# Altium PCB PCB1.PcbDoc (part 1 of 2)
Units mm, origin at the board's own origin, x right, y up, seen from the top; angles counter-clockwise.
Board outline 63.44 x 74 mm, 2 copper layers (Top Layer, Bottom Layer), stack 1.571 mm thick; 46 components, 28 nets, 149 pads, 26 vias.
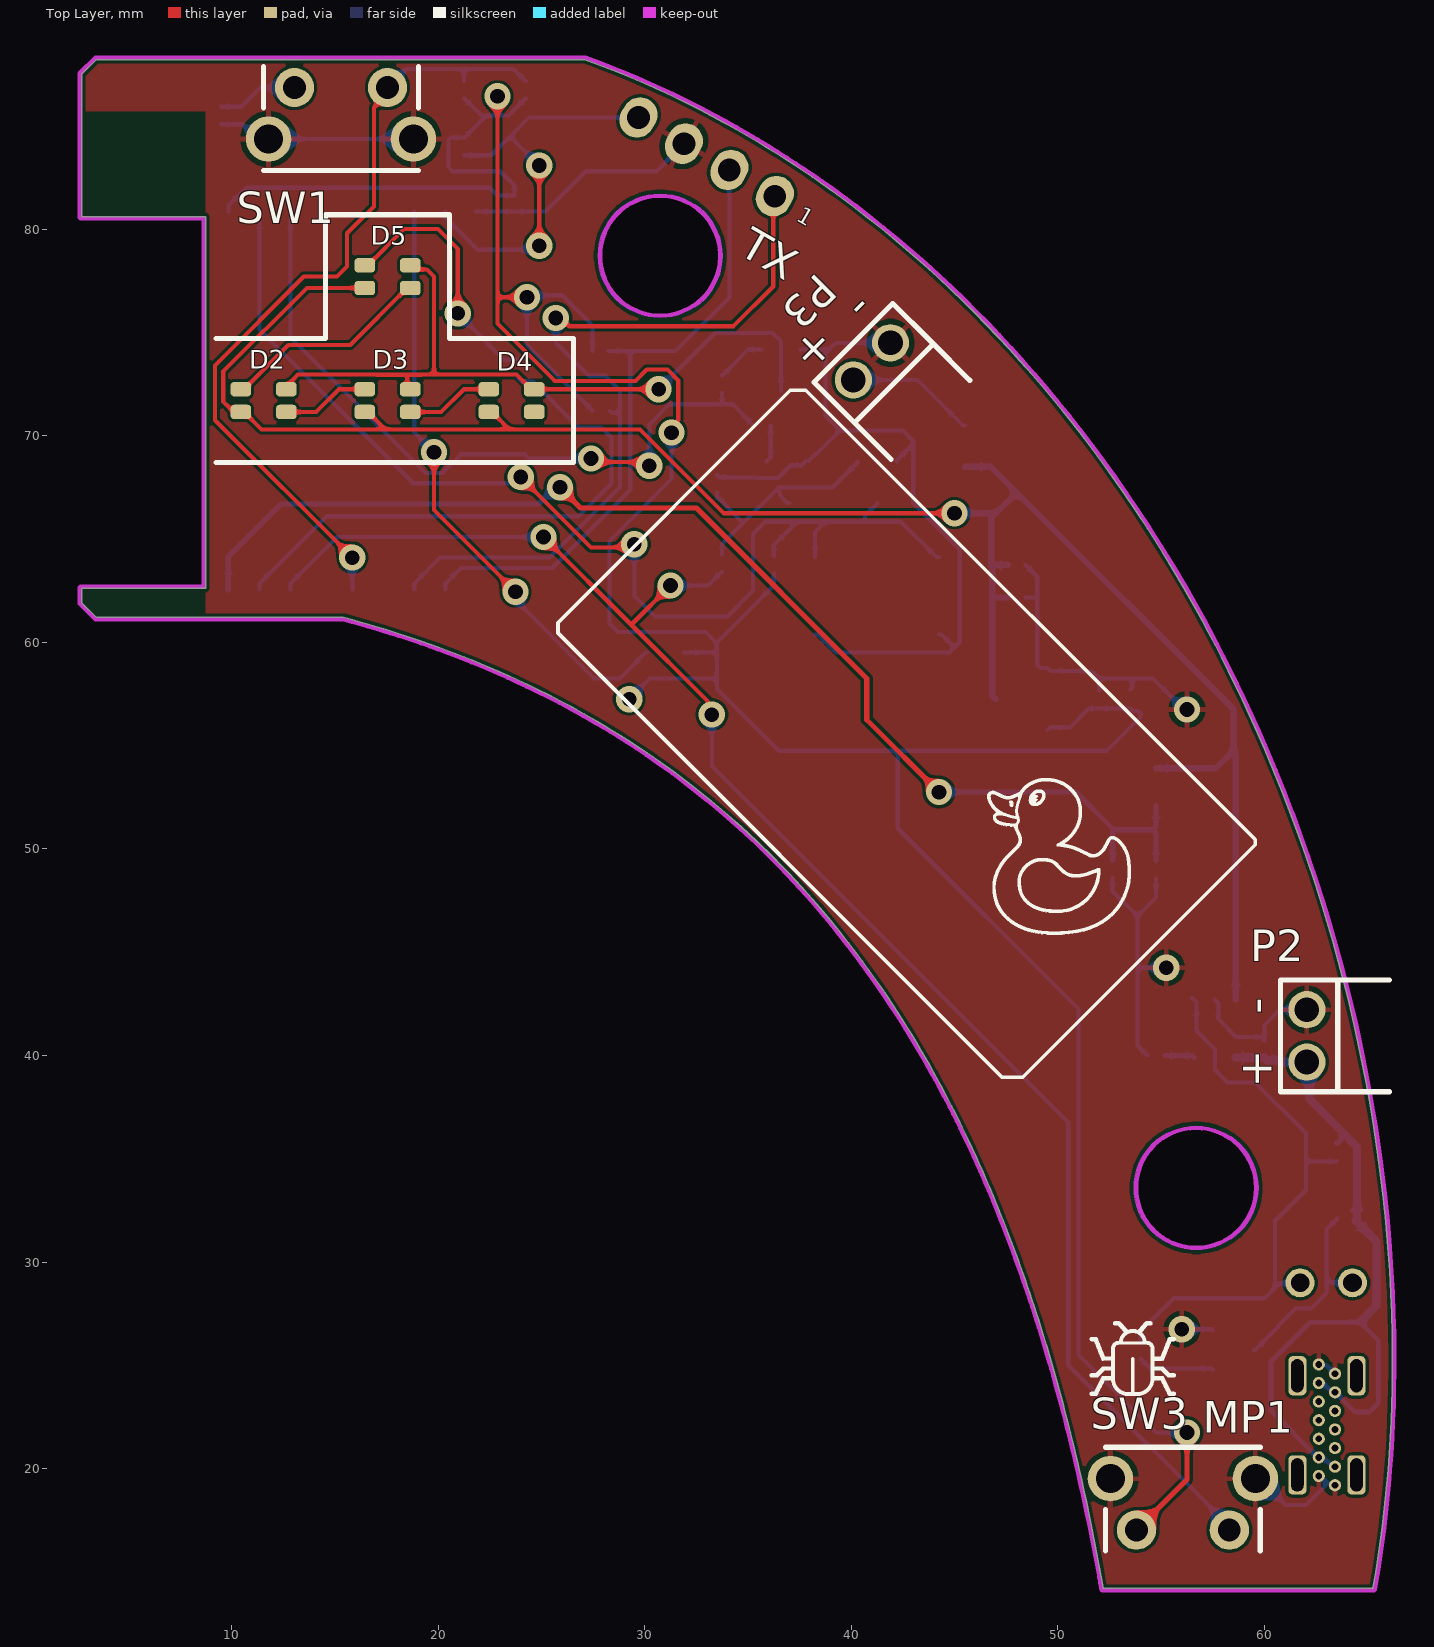
[diagram p0: Top Layer view]
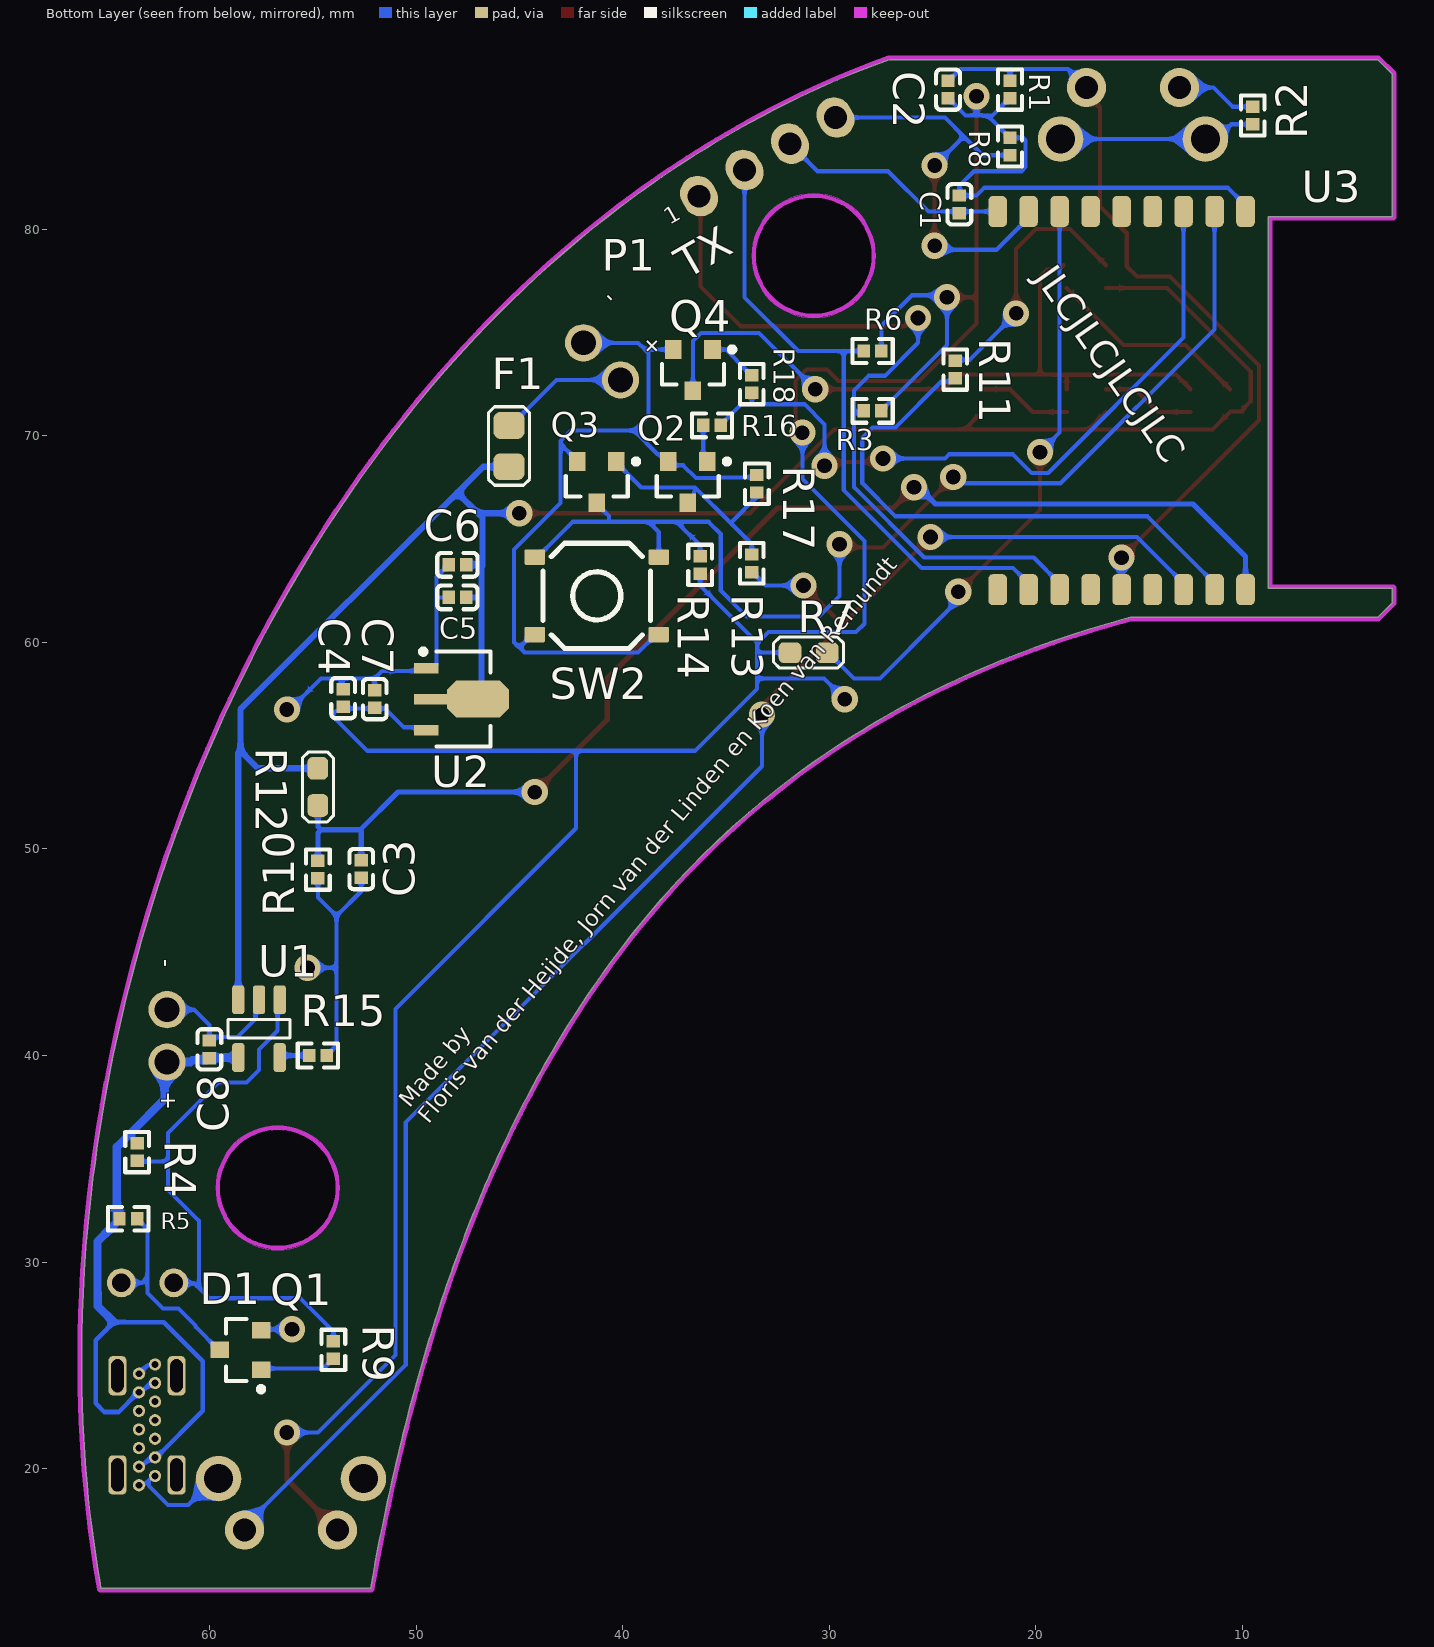
[diagram p1: Bottom Layer view, seen from below]
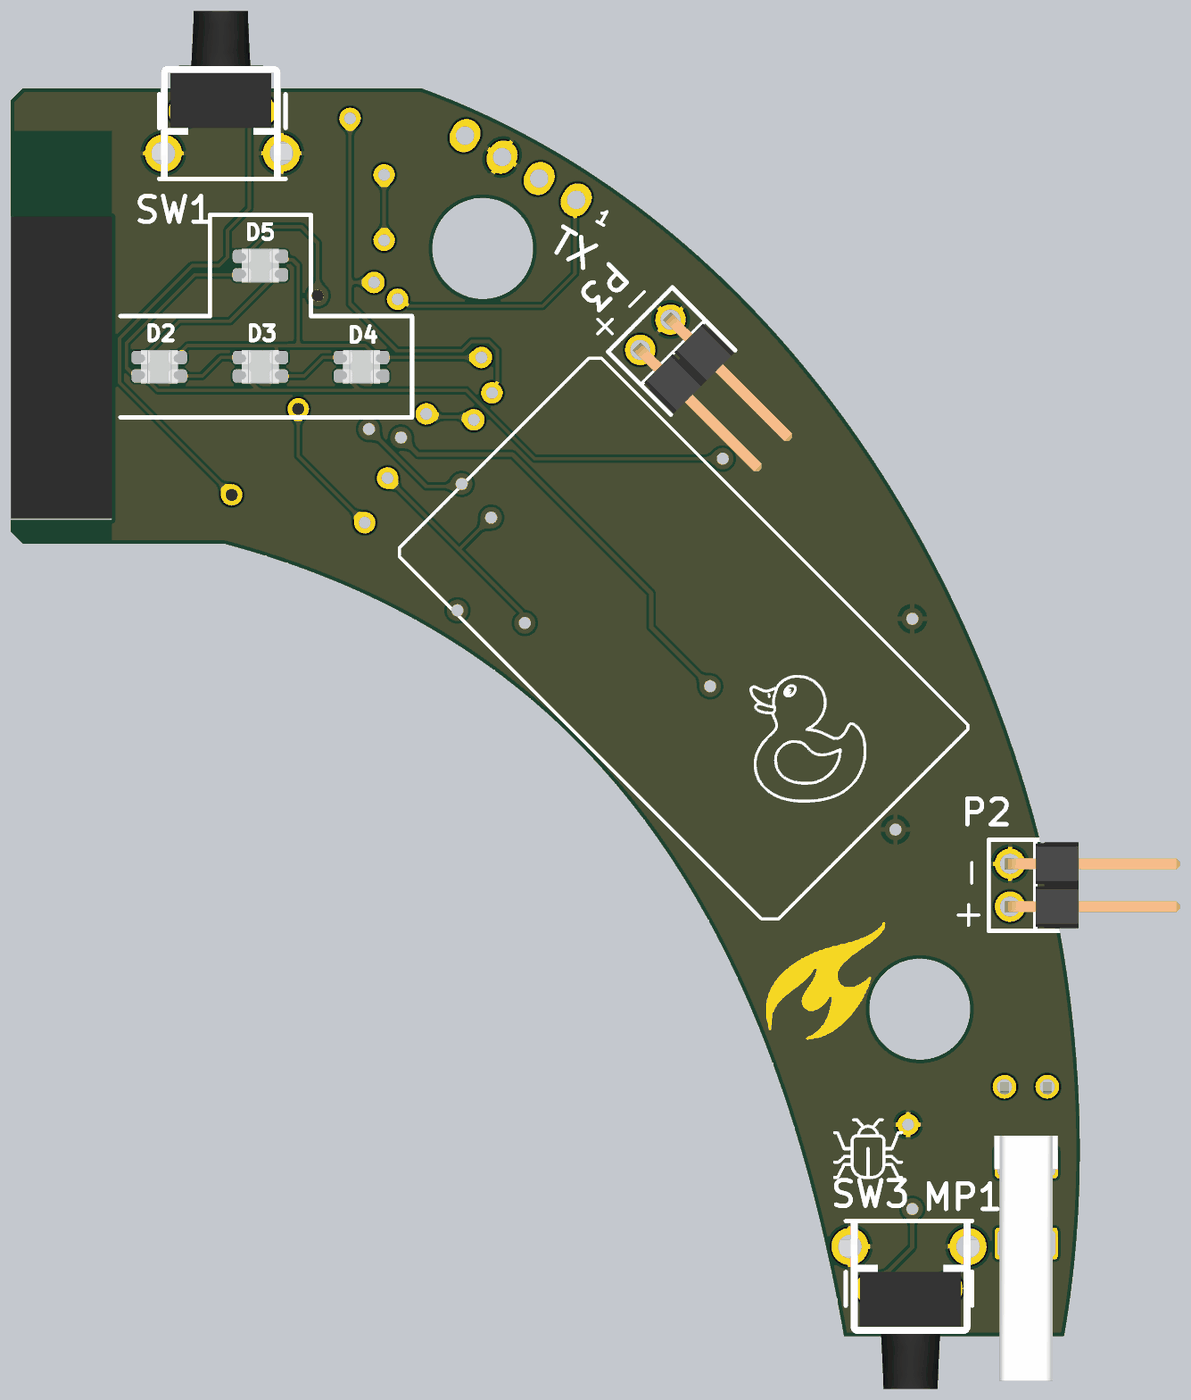
[diagram p3: 3D render of the assembled board from above, using the file's embedded part models]
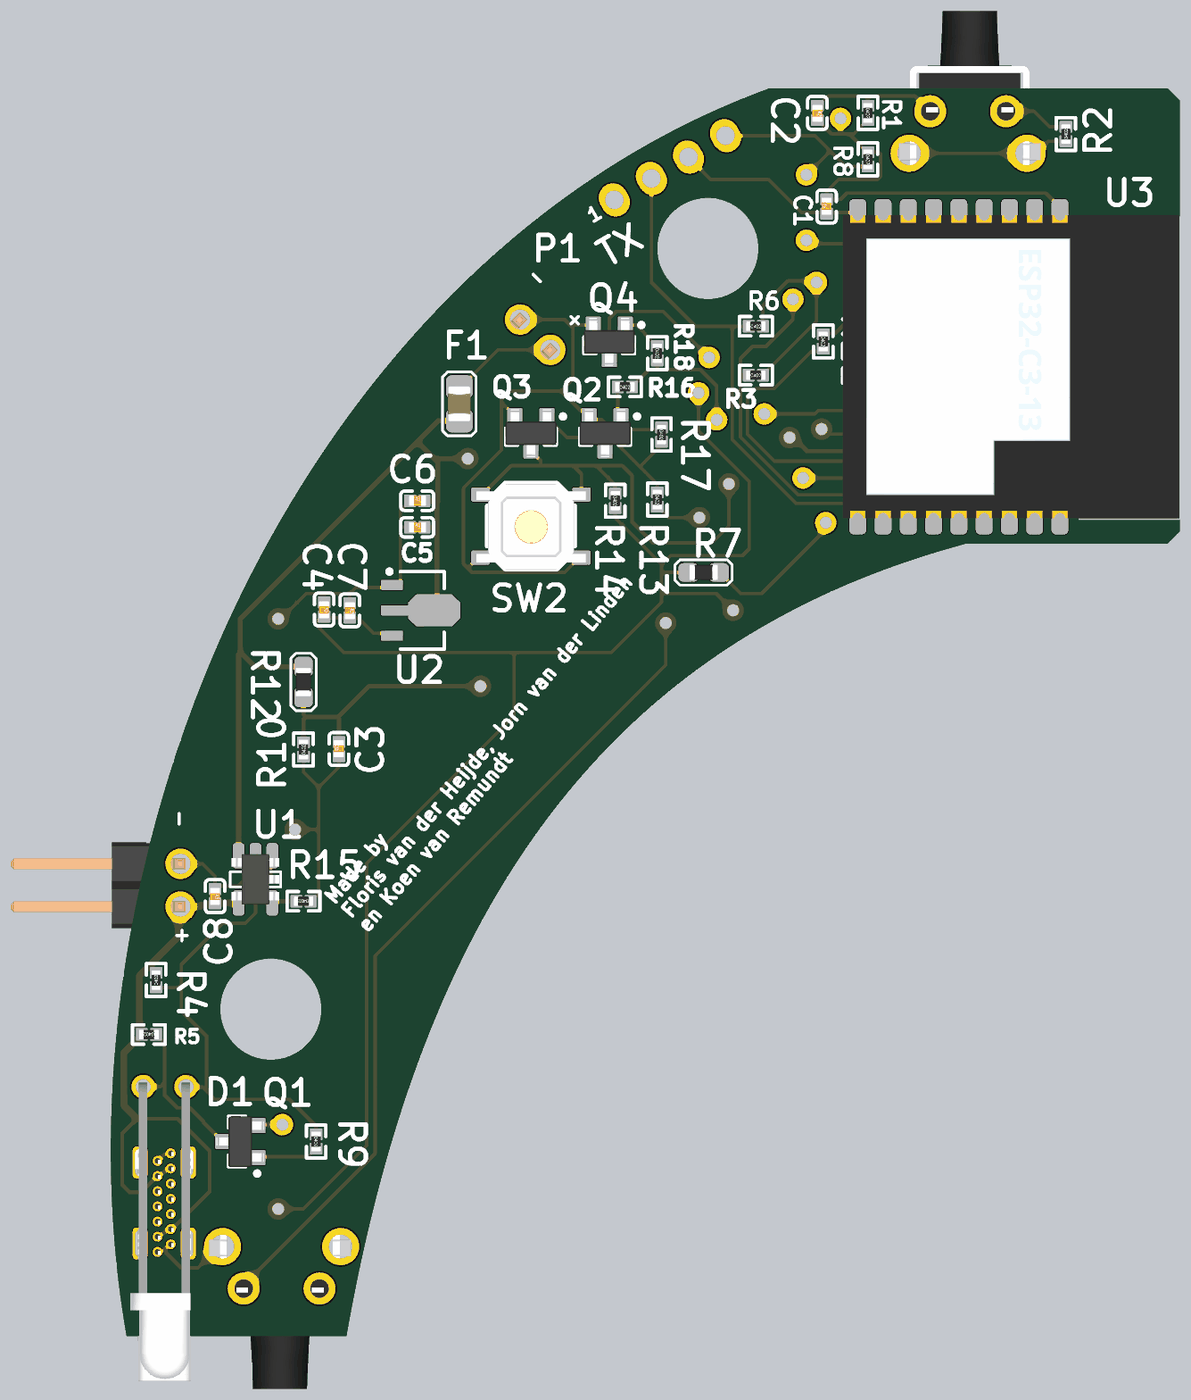
[diagram p4: 3D render of the assembled board from below, using the file's embedded part models]

## Layer stack, top to bottom
Top Solder: solder mask 0.0102, Solder Resist, Dk 3.5
Top Layer: signal copper 0.0356
Dielectric 1: dielectric 1.5, FR-4, Dk 4.8
Bottom Layer: signal copper 0.0356
Bottom Solder: solder mask 0.0102, Solder Resist, Dk 3.5

## Board outline
39.503,45.918 39.097,46.421 38.647,46.962 38.151,47.538 ccw(c5.449,18.878) 37.607,48.147 ccw(c5.795,19.193) 36.973,48.828 ccw(c6.123,19.505) 36.203,49.618 ccw(c6.657,20.055) 31.413,53.73 ccw(c6.466,19.792) 30.127,54.639 ccw(c6.218,19.43) 29.198,55.253 ccw(c5.997,19.085) 28.4,55.752 ccw(c5.759,18.698) 27.689,56.177 27.072,56.532 26.499,56.849 25.918,57.16 25.385,57.435 24.846,57.705 24.355,57.943 23.86,58.176 23.416,58.379 22.969,58.578 22.517,58.773 22.062,58.964 21.661,59.129 21.256,59.29 20.849,59.448 20.439,59.604 20.026,59.756 19.61,59.906 19.191,60.053 18.83,60.176 18.467,60.297 18.101,60.416 17.733,60.533 17.363,60.648 16.991,60.761 16.616,60.871 16.24,60.979 15.861,61.085 15.416,61.206 3.467,61.206 2.744,61.918 2.744,62.606 8.744,62.606 8.744,80.606 2.744,80.606 2.744,87.495 3.467,88.206 27.109,88.206 cw(c10.788,43.371) 29.61,87.215 cw(c10.587,42.9) 31.318,86.443 cw(c10.368,42.437) 32.674,85.771 cw(c10.129,41.973) 33.85,85.145 cw(c9.888,41.532) 34.932,84.533 cw(c9.615,41.063) 35.921,83.942 cw(c9.351,40.632) 36.822,83.376 cw(c9.062,40.181) 37.71,82.792 cw(c8.753,39.719) 38.514,82.241 cw(c8.432,39.259) 39.307,81.674 cw(c8.1,38.802) 40.09,81.093 40.793,80.553 41.487,80 42.172,79.436 42.849,78.861 43.517,78.274 44.176,77.677 44.826,77.069 45.403,76.512 45.974,75.947 46.537,75.374 47.092,74.793 47.641,74.204 48.182,73.607 48.774,72.934 49.357,72.253 49.931,71.562 50.496,70.863 51.052,70.154 51.598,69.437 52.135,68.712 52.663,67.979 53.232,67.164 53.79,66.339 54.336,65.505 54.919,64.585 55.488,63.655 56.089,62.637 56.673,61.608 cw(c-6.323,26.533) 57.284,60.487 cw(c-6.985,26.18) 57.917,59.274 cw(c-7.679,25.827) 58.568,57.966 cw(c-8.366,25.494) 59.269,56.478 cw(c-9.067,25.173) 60.011,54.805 cw(c-9.764,24.875) 60.881,52.689 cw(c-10.517,24.579) 62.023,49.597 cw(c-11.01,24.405) 64.917,38.668 cw(c-9.702,24.667) 65.288,36.524 cw(c-8.928,24.79) 65.537,34.825 cw(c-8.172,24.892) 65.726,33.304 cw(c-7.398,24.98) 65.866,31.963 65.974,30.712 66.055,29.552 66.113,28.483 66.152,27.505 66.177,26.528 66.188,25.643 66.188,24.759 66.176,23.877 66.156,23.085 66.126,22.295 66.087,21.508 66.038,20.723 65.98,19.94 65.921,19.247 65.854,18.556 65.78,17.867 65.698,17.18 65.609,16.496 65.512,15.814 65.407,15.135 65.295,14.459 65.251,14.206 52.199,14.206 52.172,14.36 52.103,14.743 52.034,15.124 51.963,15.504 51.892,15.882 51.819,16.259 51.746,16.634 51.671,17.008 51.596,17.38 51.519,17.751 51.442,18.12 51.363,18.488 51.283,18.855 51.203,19.22 51.121,19.583 51.039,19.945 50.955,20.305 50.871,20.664 50.785,21.022 50.698,21.378 50.611,21.732 50.522,22.085 50.432,22.437 50.341,22.787 50.25,23.135 50.157,23.482 50.063,23.828 49.968,24.172 49.872,24.515 49.775,24.856 49.677,25.195 49.577,25.534 49.477,25.87 49.376,26.205 49.273,26.539 49.17,26.871 49.065,27.202 48.96,27.531 48.853,27.859 48.745,28.185 48.636,28.51 48.526,28.833 48.415,29.155 48.303,29.475 48.19,29.794 48.076,30.111 47.96,30.427 47.844,30.741 47.726,31.054 47.607,31.365 47.487,31.675 47.366,31.984 47.244,32.29 47.121,32.596 46.997,32.9 46.871,33.202 46.744,33.503 46.617,33.802 46.488,34.1 46.332,34.456 46.174,34.809 46.014,35.161 45.853,35.51 45.69,35.857 45.526,36.202 45.36,36.544 45.192,36.885 45.023,37.223 44.852,37.559 44.679,37.893 44.504,38.225 44.328,38.555 44.15,38.883 43.97,39.208 43.789,39.532 43.575,39.906 43.359,40.278 43.141,40.646 42.92,41.012 42.697,41.375 42.471,41.735 42.243,42.092 41.98,42.496 41.713,42.897 41.444,43.294 41.171,43.686 40.86,44.124 40.545,44.557 40.226,44.984 39.867,45.454
cut-out: 30.751,75.711 cw(c30.751,78.711) 27.751,78.711 cw(c30.751,78.711) 30.751,81.711 cw(c30.751,78.711) 33.751,78.711 cw(c30.751,78.711)
cut-out: 56.691,30.597 cw(c56.691,33.597) 53.691,33.597 cw(c56.691,33.597) 56.691,36.597 cw(c56.691,33.597) 59.691,33.597 cw(c56.691,33.597)

## Design rules (kind name [scope] priority, off if disabled: settings)
BoardOutlineClearance [All] p1: gap=0.2 ignorepadtopadclearanceinfootprint=FALSE except(0: Arc-SplitContinuation Track-SplitContinuation SMDPad-SplitContinuation THPad-SplitContinuation Via-SplitContinuation Fill-SplitContinuation Poly-SplitContinuation Region-SplitContinuation Text-SplitContinuation)
Clearance [All] p1: gap=0.15 ignorepadtopadclearanceinfootprint=FALSE except(0: Arc-Hole Track-Hole SMDPad-Hole THPad-Hole Via-Hole Fill-Hole Poly-Hole Region-Hole Text-Hole; 0.5: SMDPad-Gold Plating)
HoleSize [All] p1: absolutevalues=TRUE maxlimit=2.54 minlimit=0.02 maxpercent=80.000 minpercent=20.000
HoleToHoleClearance [All] p1: gap=0.5 allowstackedmicrovias=TRUE
MinimumAnnularRing [All] p1: minimumring=0.13
MinimumSolderMaskSliver [All] p1: minsoldermaskwidth=0.14
PasteMaskExpansion [All] p1: expansion=0.05
PolygonConnect [All] p1: connectstyle=Relief reliefconductorwidth=0.254 reliefentries=4 polygonreliefangle="90 Angle" airgapwidth=0.254
RoutingVias [All] p1: holewidth=0.711 width=1.27 viastyle="Through Hole" minholewidth=0.711 minwidth=1.27 maxholewidth=0.711 maxwidth=1.27
SilkToSilkClearance [All] p1: silktosilkclearance=0
SilkToSolderMaskClearance [IsPad] p1: minsilkscreentomaskgap=0.15 clearancetoexposedcopper=TRUE
SolderMaskExpansion [All] p1: expansion=0.102 istentingtop=FALSE
Width [All] p1: maxlimit=0.4 minlimit=0.1 preferedwidth=0.2 minimp=50.000000 maximp=50.000000 favimp=50.000000
24 further rules are at their usual default settings.

## Components (designator, comment, footprint, x,y, rotation, side; value= is the part's Value field where it differs from the comment)
C1 "100nF" 0402_C 23.7,81.2 r90 bottom
C2 "1.0uF" 0402_C 24.25,86.75 r270 bottom
C3 "100nF" 0402_C 52.65,49.025 r90 bottom
C4 "100nF" 0402_C 53.525,57.3 r270 bottom
C5 "100nF" 0402_C 48,62.175 r180 bottom
C6 "10uF" 0402_C 48,63.75 r180 bottom
C7 "10uF" 0402_C 52,57.25 r270 bottom
C8 "1.0uF" 0402_C 60,40.3 r270 bottom
D1 "=value" "3MM ROUND LAMP" 62.992,29 r180 bottom
D2 "Neopixel WS2812B-2020" WS2812B-2020 11.556,71.7 r0 top locked
D3 "Neopixel WS2812B-2020" WS2812B-2020 17.556,71.7 r0 top locked
D4 "Neopixel WS2812B-2020" WS2812B-2020 23.556,71.7 r0 top locked
D5 "Neopixel WS2812B-2020" WS2812B-2020 17.556,77.7 r0 top locked
F1 "1A" "CAP 0805" 45.5,69.5 r90 bottom
MP1 "=value" "USBC 2169890001_SD" 63.02,22.1 r0 top locked
P1 "DNP" "WURTH 61900411121" 33,83.5 r150 bottom value=2.54mm
P2 "2.54mm" "Wurth 61300211021" 62.05,40.95 r270 top
P3 "2.54mm" "Wurth 61300211021" 40.998,73.598 r225 top locked
Q1 "MMBT3904LT1G" SOT-23-3-318-08_V 58.5,25.75 r180 bottom
Q2 "MMBT3904LT1G" SOT-23-3-318-08_V 36.85,67.75 r90 bottom
Q3 "MMBT3904LT1G" SOT-23-3-318-08_V 41.25,67.75 r90 bottom
Q4 "MMBT3904LT1G" SOT-23-3-318-08_V 36.6,73.175 r90 bottom
R1 "10KΩ ±1%" 0402_R 21.25,86.75 r270 bottom
R2 "10Ω ±1%" 0402_R 9.5,85.5 r90 bottom
R3 "10KΩ ±1%" 0402_R 27.9,71.2 r180 bottom
R4 "680Ω ±1%" 0402_R 63.5,35.325 r90 bottom
R5 "680Ω ±1%" 0402_R 63.925,32.1 r0 bottom
R6 "10KΩ ±1%" 0402_R 27.9,74.1 r180 bottom
R7 "10k" "RES 0603" 31,59.5 r180 bottom
R8 "10KΩ ±1%" 0402_R 21.25,84 r270 bottom
R9 "1KΩ ±1%" 0402_R 54,25.75 r270 bottom
R10 "1MΩ ±1%" 0402_R 54.75,49 r90 bottom
R11 "330Ω ±1%" 0402_R 23.9,73.2 r270 bottom
R12 "1.5M" "RES 0603" 54.75,53 r270 bottom
R13 "1KΩ ±1%" 0402_R 33.75,63.825 r270 bottom
R14 "10KΩ ±1%" 0402_R 36.25,63.75 r270 bottom
R15 "3.9KΩ ±1%" 0402_R 54.75,40 r0 bottom
R16 "10KΩ ±1%" 0402_R 35.675,70.5 r180 bottom
R17 "10KΩ ±1%" 0402_R 33.5,67.675 r270 bottom
R18 "10KΩ ±1%" 0402_R 33.75,72.5 r270 bottom
SW1 "TS-1093C-A13B3-D1" TS-1093C-A13B3-D1 15.3,84.36 r180 top locked
SW2 "TS-1187A-B-A-B" TS-1187A-B-A-B 41.25,62.25 r180 bottom
SW3 "TS-1093C-A13B3-D1" TS-1093C-A13B3-D1 56.05,19.52 r0 top
U1 "TP4054" "SOT 23-5" 57.6,41.3 r90 bottom
U2 "HT7333-SOT89" SOT89_L 47.7,57.25 r90 bottom
U3 "ESP32-C3N" ESP32-C3N 12.75,71.7 r270 bottom locked

## Footprints (in the part's own frame and the unit in brackets; to place one, negate y for a bottom-side part, rotate by r counter-clockwise, add the part's x,y. Pads: shape width x height; smd on the part's side, far side on the other; paste and mask are expansions set on the pad)
"3MM ROUND LAMP" [mm]
  round 1.4 hole 0.9: 1(1.27,0) 2(-1.27,0)
  body extent -2.05,-17.35 1.52,0.25, height 6.02
0402_C [mm]
  rect 0.6x0.65 smd mask+0.051: 1(-0.425,0) 2(0.425,0)
  silkscreen extent -0.97,-0.58 0.97,0.58, body extent -0.48,-0.3 0.52,0.3, height 0.2
0402_R [mm]
  rect 0.6x0.65 smd mask+0.051: 1(-0.425,0) 2(0.425,0)
  silkscreen extent -0.97,-0.58 0.97,0.58, body extent -0.57,-0.27 0.58,0.28, height 0.41
"CAP 0805" [mm] "[Last Edit: 19-05-19]"
  rrect50% 1.3x1.5 smd: 1(-1,0) 2(1,0)
  silkscreen extent -1.9,-1 1.9,1, body extent -1.05,-0.67 1.05,0.68, height 0.7
ESP32-C3N [mm]
  rrect50% 1.5x0.9 smd: 1(-9.15,2.9) 2(-9.15,1.4) 3(-9.15,-0.1) 4(-9.15,-1.6) 5(-9.15,-3.1) 6(-9.15,-4.6) 7(-9.15,-6.1) 8(-9.15,-7.6) 9(-9.15,-9.1) 10(9.15,-9.1) 11(9.15,-7.6) 12(9.15,-6.1) 13(9.15,-4.6) 14(9.15,-3.1) 15(9.15,-1.6) 16(9.15,-0.1) 17(9.15,1.4) 18(9.15,2.9)
  Multi-Layer pour cut-out: -14,10 -14,4 14,4 14,10
  body extent -9,-10 9,10, height 3.2
"RES 0603" [mm] "[Last Edit: 19-05-19]"
  rrect50% 1.1x1 smd: 1(0.9,0) 2(-0.9,0)
  silkscreen extent -1.7,-0.75 1.7,0.75, body extent -0.85,-0.45 0.85,0.45, height 0.55
SOT89_L [mm] "SOT89, 3-Leads, Body 4.5x2.4 mm, Pitch 1.5mm, Lead Span 4.1mm, IPC High Density"
  rect 0.5x1.2 smd: 1(1.5,1.8) 3(-1.5,1.8)
  oct 1.8x3 smd: 2(0,-0.7)
  rect 0.5x1.6 smd: 2(0,1.6)
  silkscreen extent -2.3,-1.3 2.42,2.08, body extent -2.3,-1.29 2.3,1.3, height 1.6
"SOT 23-5" [mm] "[Last Edit: 19-05-19]"
  rrect50% 1.4x0.6 smd: 1(1.4,-1.004) 2(1.4,0) 3(1.4,1.004) 4(-1.4,1) 5(-1.4,-1)
  silkscreen extent -0.45,-1.5 0.45,1.5, body extent -1.5,-1.42 1.5,1.42, height 1.2
SOT-23-3-318-08_V [mm] "SOT23, 3-Leads, Body 3.04x1.4mm, Pitch 0.95mm"
  rect 0.9x0.8 smd: 1(1,-0.95) 2(1,0.95) 3(-1,0)
  silkscreen extent -0.7,-2.02 1.12,1.5, body extent -1.42,-1.52 1.42,1.52, height 1.11
TS-1093C-A13B3-D1 [mm]
  round 1.9 hole 1.1: 0(-2.25,-2.49) 1(2.25,-2.49)
  round 2.2 hole 1.4: 2(-3.505,0) 3(3.505,0)
  silkscreen extent -3.75,-3.5 3.75,1.52, body extent -4.11,-8.43 4.3,1.43, height 7.02
TS-1187A-B-A-B [mm]
  rrect20% 1x0.75 smd: A(-3,1.875) B(3,1.875) C(-3,-1.875) D(3,-1.875)
  silkscreen extent -2.6,-2.55 2.6,2.55, body extent -3.24,-2.6 3.26,2.5, height 1.4
"USBC 2169890001_SD" [mm]
  round 0.59 hole 0.33 paste+0 mask+0.05: A1(-0.39,-2.45) A4(-0.39,-1.55) A5(-0.39,-0.65) A6(-0.39,0.25) A7(-0.39,1.15) A9(-0.39,2.05) A12(-0.39,2.95) B1(0.39,2.5) B4(0.39,1.6) B5(0.39,0.7) B6(0.39,-0.2) B7(0.39,-1.1) B9(0.39,-2) B12(0.39,-2.9)
  rrect50% 0.88x1.9 hole 0.6 slot 1.6 at 90 deg paste+0 mask+0.05: P1(-1.43,2.4) P2(1.43,2.4) P3(1.43,-2.4) P4(-1.43,-2.4)
  body extent -1.9,-10.55 1.86,4, height 8.94
WS2812B-2020 [mm]
  rrect50% 1x0.7 smd mask+0.08: 1(1.1,-0.55) 2(1.1,0.55) 3(-1.1,0.55) 4(-1.1,-0.55)
  body extent -1.1,-1 1.1,1, height 0.84
"Wurth 61300211021" [mm]
  round 1.8 hole 1.2: 1(-1.27,0) 2(1.27,0)
  silkscreen extent -2.7,-1.27 2.7,4, body extent -2.54,-0.29 2.54,10.07, height 2.57
"WURTH 61900411121" [mm] "[Last Edit: 03-06-19]"
  oval 1.7x2 hole 1.1: 1(-3.81,0) 2(-1.27,0) 3(1.27,0) 4(3.81,0)

## Part data
C1 C3 C4 C5: library part "0402 100nF (104) 10% 16V", "Chip capacitors", Manufacturer="Samsung Electro-Mechanics", Package=0402, PartNumber=CL05B104KO5NNNC, SuppliersPartNumber=C1525, Tolerance=10%, Voltage=16V, Capacitance=100nF, ComponentLink1Description="Supplier link", ComponentLink1URL=http://www.szlcsc.com/product/details_1877.html, Supplier=LC
C2 C8: library part "0402 1.0uF (105) 10% 25V", "Chip capacitor", Capacitance=1uF, Manufacturer="Samsung Electro-Mechanics", Package=0402, PartNumber=CL05A105KA5NQNC, SuppliersPartNumber=C52923, Tolerance=10%, Voltage=25V, ComponentLink1Description="Supplier link", ComponentLink1URL=http://www.szlcsc.com/product/details_53938.html, Supplier=LC
C6 C7: library part "0402 10uF (106) 20% 6.3V", "Chip capacitors", Manufacturer="Samsung Electro-Mechanics", Package=0402, PartNumber=CL05A106MQ5NUNC, SuppliersPartNumber=C15525, Tolerance=20%, Voltage=6.3V, Capacitance=10uF, ComponentLink1Description="Supplier link", ComponentLink1URL=http://www.szlcsc.com/product/details_16204.html, Supplier=LC
D1: library part MT2030-HRG-A, "Dual LED inverted orange-green pins", Created By="Koen van Remundt", Datasheet=https://nl.mouser.com/datasheet/2/1094/MT2030_HRG_A-2258170.pdf, Supplier=Mouser, Supplier number=193-MT2030-HRG-A
F1: library part "PTC Fuse 1A", "6V, 0805", Created By="Koen van Remundt", Datasheet=https://datasheet.lcsc.com/lcsc/1808132010_TECHFUSE-SMD0805-050_C66452.pdf, Date Created=14-10-2021, Specs=6V, Supplier E.g.=JLCPCB, Supplier E.g. Number=C66452
MP1: library part "USBC 21269890001", "Vertical USB2.0 C connector", Manufacturer number=216989-0001, Datasheet URL=https://www.molex.com/pdm_docs/sd/2169890001_sd.pdf, Supplier=Mouser, Supplier number=538-216989-0001
P1: library part "WR-WTB x4 2.54mm Straight", "TH, 4Pos, 2.54mm Pitch, 0.08-0.33mm², 3A", Manufacturer=Wurth, Max Operating Temperature=105°C, Created By="Koen van Remundt", Datasheet URL=https://katalog.we-online.com/em/datasheet/61900411121.pdf, Date Created=03-06-2019, Product Code=61900411121, Supplier 1=Wurth, Supplier 1 Number=61900411121
P2 P3: library part "2Header Male pin", "TH, 2Pos, 2.54mm Pitch", Manufacturer=TE, Max Operating Temperature=105°C, Created By="Koen van Remundt", Datasheet URL=https://datasheet.lcsc.com/lcsc/1811051111_TE-Connectivity-640457-2_C86507.pdf, Date Created=14-10-2021, Product Code=640457-2, Supplier 1=JLCPCB, Supplier 1 Number=C86507
R1 R3 R6 R8 R14 R16 R17 R18: library part "0402 10K (1002) 1%", "Chip resistor", Manufacturer="Uniroyal Elec", Package=0402, PartNumber=0402WGF1002TCE, Power=1/16W, Resistance=10KΩ, SuppliersPartNumber=C25744, Tolerance=1%, ComponentLink1Description="Supplier link", ComponentLink1URL=http://www.szlcsc.com/product/details_26487.html, Supplier=LC
R2: library part "0402 10R (10R0) 1%", "Chip resistor", Manufacturer="Uniroyal Elec", Package=0402, PartNumber=0402WGF100JTCE, Power=1/16W, Resistance=10Ω, SuppliersPartNumber=C25077, Tolerance=1%, ComponentLink1Description="Supplier link", ComponentLink1URL=http://www.szlcsc.com/product/details_25820.html, Supplier=LC
R4 R5: library part "0402 680R (6800) 1%", "Chip resistor", Manufacturer="Uniroyal Elec", Package=0402, PartNumber=0402WGF6800TCE, Power=1/16W, Resistance=680Ω, SuppliersPartNumber=C25130, Tolerance=1%, ComponentLink1Description="Supplier link", ComponentLink1URL=http://www.szlcsc.com/product/details_25873.html, Supplier=LC
R7: library part "Res 10k, 0603", "1%, >100mW", Created By="Koen van Remundt", Datasheet=https://datasheet.lcsc.com/lcsc/1811062009_UNI-ROYAL-Uniroyal-Elec-0603WAF1002T5E_C25804.pdf, Date Created=02-08-2021, Specs="1%, >50V, >100mW", Supplier=JLCPCB, Supplier number=C25804
R9 R13: library part "0402 1K (1001) 1%", "Chip resistor", Manufacturer="Uniroyal Elec", Package=0402, PartNumber=0402WGF1001TCE, Power=1/16W, Resistance=1KΩ, SuppliersPartNumber=C11702, Tolerance=1%, ComponentLink1Description="Supplier link", ComponentLink1URL=http://www.szlcsc.com/product/details_12256.html, Supplier=LC
R10: library part "0402 1M (1004) 1%", "Chip resistor", Manufacturer="Uniroyal Elec", Package=0402, PartNumber=0402WGF1004TCE, Power=1/16W, Resistance=1MΩ, SuppliersPartNumber=C26083, Tolerance=1%, ComponentLink1Description="Supplier link", ComponentLink1URL=http://www.szlcsc.com/product/details_26826.html, Supplier=LC
R11: library part "0402 330R (3300) 1%", "Chip resistor", Manufacturer="Uniroyal Elec", Package=0402, PartNumber=0402WGF3300TCE, Power=1/16W, Resistance=330Ω, SuppliersPartNumber=C25104, Tolerance=1%, ComponentLink1Description="Supplier link", ComponentLink1URL=http://www.szlcsc.com/product/details_25847.html, Supplier=LC
R12: library part "Res 1.5M, 0603", "1%, >100mW", Created By="Koen van Remundt", Datasheet=https://datasheet.lcsc.com/lcsc/1811081713_UNI-ROYAL-Uniroyal-Elec-0603WAF6800T5E_C23228.pdf, Date Created=15-10-2021, Specs="1%, >100mW", Supplier=JLCPCB, Supplier number=C4172
R15: library part "0402 3.9K (3901) 1%", "Chip resistor", Manufacturer="Uniroyal Elec", Package=0402, PartNumber=0402WGF3901TCE, Power=1/16W, Resistance=3.9KΩ, SuppliersPartNumber=C51721, Tolerance=1%, ComponentLink1Description="Supplier link", ComponentLink1URL=http://www.szlcsc.com/product/details_52734.html, Supplier=LC
U1: "3.7V Li-Po charger", Manufacturer=Microchip, Max Operating Temperature=85°C, Created By="Koen van Remundt", Datasheet URL=https://datasheet.lcsc.com/lcsc/1809261814_TOPPOWER-Nanjing-Extension-Microelectronics-TP4054_C32574.pdf, Date Created=05-10-2021, Product Code=TP4054, Supplier 1=JLCPCB, Supplier 1 Number=C32574
U2: library part CMP-0204-00157-1, "Low Power Consumption LDO, Output Voltage 3.3V, SOT89 Pkg", Code_IPC=SOT89, Datasheet=https://datasheet.lcsc.com/lcsc/1811101813_Holtek-Semicon-HT7333-1_C77777.pdf, DatasheetVersion="Rev1.4, Jan-2006", PackageDescription="3-Pin SOT-89 Package 1.5 mm Pitch, 4.1 mm Lead Span", PackageReference=SOT89, PackageVersion=May-2010
D2 D3 D4 D5: Datasheet=https://nl.mouser.com/datasheet/2/737/4684_WS2812B_2020_V1_3_EN-1900866.pdf, Supplier=Mouser, Supplier number=485-4684
Q1 Q2 Q3 Q4: ComponentLink1Description=Datasheet, ComponentLink1URL=https://assets.nexperia.com/documents/data-sheet/MMBT3904.pdf
SW1 SW3: ComponentLink1Description=Datasheet, ComponentLink1URL=https://datasheet.lcsc.com/lcsc/2003171934_Yuandi-TS-1093C-A10B3-D1_C493053.pdf
SW2: ComponentLink1Description=Datasheet, ComponentLink1URL=https://datasheet.lcsc.com/lcsc/2002271431_XKB-Connectivity-TS-1187A-B-A-B_C318884.pdf

## Via types
v1: diameter 1.27, hole 0.711, Top Layer to Bottom Layer, 26 vias

## Nets (pads, with @x,y where several pads share a name; then routed paths per layer and width w, separated by ;. In a path a pad name is that pad's centre, name@x,y a point inside that pad or via, vN(x,y) a via of type N, cw(c..) or ccw(c..) an arc to the next point about the centre after c; other vN are vias at no path point)
3V3: C1.2 C2.2 C4.2 C7.2 R1.2 R3.2 R6.2 R7.2 R8.1 R14.2 SW3.0 U2.3 U3.1 | length 166.3
  Top Layer w0.2: v1(22.875,86.425) 22.875,76.7 ; v1(24.3,76.7) 22.875,76.7 ; v1(31.3,70.15) 31.3,70.44 31.625,70.765 31.625,72.675 31.1,73.2 30.1,73.2 29.55,72.65 25.65,72.65 22.875,75.425 22.875,76.7
  Top Layer w0.254: SW3.0@53.8,17.03 56.25,19.48 v1(56.25,21.75)
  Bottom Layer w0.2: U3.1@9.85,80.85 9.85,81.15 10.7,82 22.5,82 22.875,81.625 C1.2@23.7,81.625 23.692,81.633 23.692,81.708 23.692,82.108 23,82.8 20.7,82.8 20.5,83 20.5,84.3 20.625,84.425 R8.1@21.25,84.425 21.275,84.425 22.35,85.5 ; R1.2@21.25,86.325 21.275,86.325 22.1,85.5 22.35,85.5 ; v1(22.875,86.425) 22.875,85.5 ; C2.2@24.25,86.325 24.225,86.325 23.4,85.5 22.875,85.5 ; R3.2@27.475,71.2 27.475,71.225 24.3,74.4 v1(24.3,76.7) 24.4,76.8 26,76.8 27.475,75.325 R6.2@27.475,74.1 ; v1(29.25,57.25) 30.25,58.25 33.5,58.25 ; v1(31.3,70.15) 31.3,67.9 28.3,64.9 28.3,60.9 28.7,60.5 32.946,60.5 33.5,59.946 ; R7.2@31.9,59.5 33.5,59.5 ; R14.2@36.25,63.325 36.25,62.75 33.5,60 33.5,59.946 ; U2.3@49.5,55.75 49.637,55.887 50.587,55.887 51.492,56.792 51.992,56.792 52,56.8 53.525,56.8 53.65,56.675 53.875,56.675 53.992,56.558 53.992,56.392 52.35,54.75 42.25,54.75 ; v1(56.25,21.75) 54.75,21.75 51,25.5 51,42.25 42.25,51 42.25,54.75 ; 22.35,85.5 22.875,85.5 ; 33.5,58.25 33.5,59.5 ; 33.5,58.25 33.5,57.75 36.5,54.75 42.25,54.75 ; 33.5,59.5 33.5,59.946
BTN: C2.1 R1.1 SW1.0 U3.14 | length 39.3
  Top Layer w0.2: v1(15.85,64.1) 9.2,70.75 9.2,73.4 13.5,77.7 15.1,77.7 15.6,78.2 15.6,79.8 16.9,81.1 16.9,85.898 17.55,86.548 SW1.0@17.55,86.85
  Bottom Layer w0.2: U3.14@15.85,62.55 v1(15.85,64.1) ; SW1.0@17.55,86.85 18.45,87.75 21.25,87.75 ; R1.1@21.25,87.175 21.25,87.75 ; C2.1@24.25,87.175 24.225,87.175 23.65,87.75 21.25,87.75
ChrgStat: D1.1 R4.1 R9.1 U1.1 | length 28.4
  Bottom Layer w0.2: R9.1@54,26.175 54,26.65 55.6,28.25 60,28.25 60.5,28.75 ; U1.1@56.5,42.791 56.7,42.591 56.7,41.2 57.6,40.3 57.6,39.3 58.2,38.7 59.55,38.7 62,36.25 62,34.875 ; D1.1@61.722,29 61.693,28.972 60.722,28.972 60.5,28.75 ; R4.1@63.5,34.9 63.475,34.875 62,34.875 ; 60.5,28.75 60.5,32 62,33.5 62,34.875
CONF: R13.2 SW3.1 U3.16 | length 81
  Top Layer w0.2: v1(25.1,65.1) 29.3,60.9 ; v1(31.25,62.75) 29.4,60.9 29.3,60.9 ; v1(33.25,56.5) 33.25,56.95 33.09,56.95 33.045,56.994 33.045,57.155 29.3,60.9
  Bottom Layer w0.2: U3.16@12.85,62.55 12.85,62.85 15.1,65.1 v1(25.1,65.1) ; v1(31.25,62.75) 33.075,62.75 33.725,63.4 R13.2@33.75,63.4 ; v1(33.25,56.5) 33.25,54 50.5,36.75 50.5,25.03 SW3.1@58.5,17.03
Enable: Q3.3 R14.1 SW2.A SW2.B U3.2 | length 55.7
  Top Layer w0.2: v1(24,68) 27.402,64.598 29.348,64.598 v1(29.5,64.75)
  Bottom Layer w0.2: U3.2@11.35,80.85 11.35,75.15 18.8,67.7 23.41,67.7 23.71,68 v1(24,68) ; v1(29.5,64.75) 29.5,62.25 30.5,61.25 34,61.25 35.25,62.5 35.25,65.25 35.834,65.834 37.384,65.834 ; R14.1@36.25,64.175 36.25,64.7 37.384,65.834 ; SW2.B@38.25,64.125 38.25,65.334 38.75,65.834 ; Q3.3@41.25,66.75 41.25,66.7 40.667,66.117 40.667,65.917 40.584,65.834 ; SW2.A@44.25,64.125 44.125,64.125 42.416,65.834 40.584,65.834 ; 37.384,65.834 38.75,65.834 ; 38.75,65.834 40.584,65.834
GND: C1.1 C3.1 C4.1 C5.1 C6.1 C7.1 C8.1 MP1.A1 MP1.A12 MP1.B1 MP1.B12 P1.3 P2.1 P3.1 Q1.2 Q2.2 Q3.2 Q4.2 R2.1 R10.1 R15.1 R17.1 SW1.2 SW1.3 SW2.C SW2.D SW3.2 SW3.3 U1.2 U2.1 U3.9 | length 102.9
  Bottom Layer w0.2: R2.1@9.5,85.075 10.539,85.075 11.254,84.36 SW1.3@11.795,84.36 SW1.2@18.805,84.36 ; U3.9@21.85,80.85 23.65,80.85 25.2,80.85 27.15,82.8 30.565,82.8 P1.3@31.9,84.135 ; R17.1@33.5,68.1 33.608,67.992 34.008,67.992 34.029,67.971 35.328,67.971 35.353,67.946 36.447,67.946 37.068,68.567 37.592,68.567 Q2.2@37.8,68.775 ; Q4.2@37.55,74.175 38.925,74.175 ; Q2.2@37.95,68.775 37.95,68.8 38.25,69.1 38.3,69.1 39.45,70.25 ; SW2.D@38.25,60.375 38.375,60.375 39.25,59.5 44.75,59.5 45,59.75 ; P3.1@41.896,74.496 39.246,74.496 38.925,74.175 ; Q3.2@42.2,68.75 42.2,68.8 43,69.6 ; SW2.C@44.25,60.375 44.375,60.375 45,59.75 ; C5.1@48.425,62.175 48.975,62.175 49,62.2 ; C6.1@48.425,63.75 49,63.175 49,62.5 49,62.2 ; C7.1@52,57.675 52,58.25 ; C3.1@52.65,48.6 52.65,47.95 53.85,46.75 ; C4.1@53.525,57.725 53.6,57.8 53.6,58.25 ; R15.1@54.325,40 54.325,40.025 54.125,40.225 54.1,40.225 53.85,40.475 53.85,44.25 ; R10.1@54.75,48.575 54.75,47.65 53.85,46.75 ; v1(55.25,44.25) 53.85,44.25 ; v1(56,26.75) 57.45,26.75 Q1.2@57.5,26.7 ; v1(56.25,56.75) 56.1,56.75 54.6,58.25 53.6,58.25 ; U1.2@57.6,42.7 57.769,42.531 57.769,41.762 58.631,40.9 59.825,40.9 C8.1@60,40.725 60,41.475 60.745,42.22 P2.1@62.05,42.22 ; SW3.3@59.755,19.52 61.025,18.25 62,18.25 62.918,19.168 62.918,19.463 63.105,19.277 63.333,19.277 MP1.B12@63.41,19.2 ; MP1.A12@62.63,25.05 62.68,25 63.01,25 MP1.B1@63.41,24.6 ; 38.925,74.175 38.75,74 38.75,70.95 39.45,70.25 ; 39.45,70.25 42.5,70.25 43,69.75 43,69.6 ; 43,69.6 43,66.75 45.25,64.5 45.25,60 45,59.75 ; 49,62.2 49,58.9 49.15,58.75 U2.1@49.5,58.75 49.637,58.613 51.637,58.613 52,58.25 ; 52,58.25 53.6,58.25 ; 53.85,44.25 53.85,46.75
IO9: P1.4 R8.2 U3.8 | length 20.6
  Top Layer w0.2: v1(24.9,79.2) v1(24.9,83.08)
  Bottom Layer w0.2: U3.8@20.35,80.85 20.35,80.55 21.9,79 24.7,79 v1(24.9,79.2) ; R8.2@21.275,83.575 22.575,83.575 23.49,84.49 ; v1(24.9,83.08) 23.49,84.49 ; P1.4@29.7,85.405 24.405,85.405 23.49,84.49
LED: R11.2 U3.17 | length 27.2
  Bottom Layer w0.2: U3.17@11.35,62.55 11.35,62.85 14.6,66.1 26.8,66.1 28.4,67.7 28.4,69.9 27.9,70.4 26.8,70.4 24.587,72.613 24.062,72.613 R11.2@23.9,72.775
NetD1_2: D1.2 Q1.3 R5.1 | length 9.9
  Bottom Layer w0.2: Q1.3@59.5,25.75 59.55,25.75 60.675,26.875 60.675,26.925 61.5,27.75 62.25,27.75 63,28.5 63,29.25 ; R5.1@63.5,32.1 63.5,32.075 63.3,31.875 63.275,31.875 63,31.6 63,29.25 ; D1.2@64.262,29 63.25,29 63,29.25
NetD2_1: D2.1 D3.3 | length 4.6
  Top Layer w0.2: D2.1@12.506,71.15 14.1,71.15 15.2,72.25 D3.3@16.606,72.25
NetD2_2: D2.2 D3.2 D4.2 D5.2 Q4.3 | length 35.2
  Top Layer w0.2: D2.2@12.506,72.25 13.21,72.954 17,72.954 17.006,72.949 18.389,72.949 ; D3.2@18.506,72.25 18.506,72.831 18.389,72.949 ; D5.2@18.656,78.25 18.86,78.046 19.454,78.046 19.8,77.7 19.8,72.954 ; v1(30.675,72.25) 24.506,72.25 23.802,72.954 19.8,72.954 ; 18.389,72.949 19.205,72.949 19.21,72.954 19.8,72.954
  Bottom Layer w0.2: v1(30.675,72.25) 33.404,74.979 36.197,74.979 36.6,74.576 Q4.3@36.6,72.175
NetD2_3: D2.3 D5.1 | length 9.9
  Top Layer w0.2: D2.3@10.606,72.25 12.75,74.394 15.75,74.394 D5.1@18.506,77.15
NetD3_1: D3.1 D4.3 | length 4.6
  Top Layer w0.2: D3.1@18.506,71.15 20.15,71.15 21.25,72.25 D4.3@22.606,72.25
NetD5_3: D5.3 R11.1 | length 12.5
  Top Layer w0.2: D5.3@16.606,78.25 18.356,80 20,80 20.955,79.045 v1(20.955,75.921)
  Bottom Layer w0.2: v1(20.955,75.921) 23.201,73.675 R11.1@23.9,73.675
NetF1_2: F1.2 P3.2 | length 6.3
  Bottom Layer w0.2: P3.2@40.1,72.7 43.2,72.7 45.4,70.5 F1.2@45.5,70.5
NetQ1_1: Q1.1 R9.2 | length 3.7
  Bottom Layer w0.2: R9.2@54,25.325 54.475,24.85 57.45,24.85 Q1.1@57.5,24.8
NetQ2_1: Q2.1 R16.1 | length 1.8
  Bottom Layer w0.2: Q2.1@35.9,68.75 36.1,68.95 R16.1@36.1,70.5
NetQ2_3: Q2.3 Q3.1 R13.1 R17.2 | length 11.8
  Bottom Layer w0.2: R17.2@33.5,67.25 33.5,67.05 34.717,65.833 34.717,65.717 ; R13.1@33.75,64.25 33.75,64.75 34.717,65.717 ; Q2.3@37,66.75 36.9,66.75 36.55,67.1 36.55,67.284 36.5,67.334 36.5,67.492 ; Q3.1@40.3,68.75 40.3,68.7 39.1,67.5 36.657,67.5 36.649,67.492 36.5,67.492 ; 34.717,65.717 36.492,67.492 36.5,67.492
NetQ4_1: Q4.1 R18.1 | length 2.4
  Bottom Layer w0.2: R18.1@33.75,72.925 33.775,72.925 34.488,73.637 34.488,73.662 35,74.175 Q4.1@35.65,74.175
NetR2_2: R2.2 SW1.1 | length 3.9
  Bottom Layer w0.2: R2.2@9.5,85.925 10.475,85.925 11.4,86.85 SW1.1@13.05,86.85
NetR7_1: R7.1 U3.7 | length 29.3
  Top Layer w0.2: v1(19.8,69.2) 19.8,66.4 v1(23.75,62.45)
  Bottom Layer w0.2: U3.7@18.85,80.85 18.85,70.15 v1(19.8,69.2) ; v1(23.75,62.45) 23.75,62.05 24.7,61.1 27.55,58.25 28.8,58.25 30.05,59.5 R7.1@30.1,59.5
NetR15_2: R15.2 U1.5 | length 1.5
  Bottom Layer w0.254: R15.2@55.175,40 56.5,40 U1.5@56.6,39.9
RDY: R16.2 R18.2 U3.3 | length 35.2
  Top Layer w0.2: v1(27.4,68.9) 27.575,68.725 30.05,68.725 v1(30.225,68.55)
  Bottom Layer w0.2: U3.3@12.85,80.85 12.85,74.75 19.4,68.2 20.2,68.2 21.1,69.1 24.2,69.1 24.4,68.9 v1(27.4,68.9) ; v1(30.225,68.55) 30.225,70.55 31.2,71.525 33.8,71.525 ; R18.2@33.75,72.075 33.75,71.575 33.8,71.525 ; R16.2@35.25,70.5 35.25,70.525 34.25,71.525 33.8,71.525
RX: P1.2 R6.1 U3.11 | length 30.9
  Bottom Layer w0.2: U3.11@20.35,62.55 20.35,62.85 21.1,63.6 25.525,63.6 29.3,67.375 29.3,74.1 ; R6.1@28.243,74.1 29.3,74.1 ; P1.2@34.1,82.865 34.1,76.7 31.5,74.1 29.3,74.1
TX: P1.1 R3.1 U3.12 | length 38.5
  Top Layer w0.2: v1(25.7,75.7) 25.952,75.7 26.352,75.3 34.3,75.3 36.225,77.225 36.225,81.52 P1.1@36.3,81.595
  Bottom Layer w0.2: U3.12@18.85,62.55 18.85,62.85 20.1,64.1 25.4,64.1 28.808,67.508 28.808,71.016 28.808,71.108 ; v1(25.7,75.7) 25.7,74.5 27.3,72.9 28.1,72.9 28.808,72.192 28.808,71.108 ; R3.1@28.325,71.2 28.417,71.108 28.808,71.108
"USB 5V": C8.2 MP1.A4 MP1.A9 MP1.B4 MP1.B9 P2.2 R4.2 R5.2 U1.4 | length 38.6
  Bottom Layer w0.225: MP1.A4@62.616,20.536 62.587,20.536 60.317,22.806 60.317,25.198 62.216,27.097 64.622,27.097 65.509,26.21 65.509,23.176 65.077,22.744 64.401,22.744 63.46,23.686 MP1.B4@63.424,23.686 ; MP1.A4@62.63,20.55 62.7,20.48 62.902,20.48 63.124,20.258 63.153,20.258 63.326,20.086 MP1.B9@63.396,20.086 ; MP1.A9@62.63,24.15 62.7,24.08 62.902,24.08 63.124,23.858 63.153,23.858 63.326,23.686 MP1.B4@63.396,23.686
  Bottom Layer w0.254: R4.2@63.5,35.75 63.525,35.75 63.698,35.923 63.698,36.161 63.8,36.263
  Bottom Layer w0.4: U1.4@58.6,39.9 C8.2@60,39.9 ; C8.2@60,39.875 60.025,39.875 60.125,39.775 60.825,39.775 60.92,39.68 P2.2@62.05,39.68 P2.2@61.545,39.175 ; P2.2@61.7,39.175 62.033,39.175 62.175,39.033 62.175,37.888 63.8,36.263 64.479,35.584 R5.2@64.479,32.079 ; R5.2@64.413,32 64.423,32 64.75,31.673 64.75,31.663 65.416,30.997 65.416,28.522 65.405,28.511 65.405,27.88 64.622,27.097
Vbat: C5.2 C6.2 D2.4 D3.4 D4.4 D5.4 F1.1 R12.2 U1.3 U2.2 | length 100.4
  Top Layer w0.2: D3.4@16.606,71.15 17.456,70.3 ; D5.4@16.606,77.15 13.65,77.15 9.6,73.1 9.6,71.65 10.073,71.177 10.579,71.177 11.456,70.3 17.456,70.3 ; D4.4@22.606,71.15 23.456,70.3 ; v1(45,66.25) 33.825,66.25 29.775,70.3 23.456,70.3 ; 17.456,70.3 23.456,70.3
  Bottom Layer w0.3: v1(45,66.25) 47,66.25 ; F1.1@45.5,68.5 46.75,68.5 48,67.25 ; U2.2@47,57.25 46.825,57.425 46.825,62.2 ; C5.2@47.575,62.175 46.85,62.175 46.825,62.2 ; C6.2@47.575,63.75 46.825,63.75 ; R12.2@54.75,53.9 57.65,53.9 58.5,54.75 ; U1.3@58.604,42.7 58.604,54.646 58.5,54.75 ; 46.825,62.2 46.825,63.75 ; 46.825,63.75 46.775,63.7 46.775,66.025 47,66.25 ; 47,66.25 48,67.25 ; 48,67.25 58.5,56.75 58.5,54.75
VbatADC: C3.2 R10.2 R12.1 U3.18 | length 60
  Top Layer w0.254: v1(25.9,67.5) 26.9,66.5 32.5,66.5 40.75,58.25 40.75,56.25 v1(44.25,52.75)
  Bottom Layer w0.254: U3.18@9.85,62.55 9.85,64.15 12.4,66.7 24.863,66.7 25.663,67.5 v1(25.9,67.5) ; v1(44.25,52.75) 50.876,52.75 52.701,50.925 54.601,50.925 ; C3.2@52.65,49.45 52.65,50.85 ; R10.2@54.75,49.425 54.75,50.776 54.601,50.925 ; R12.1@54.75,52.1 54.75,51.074 54.601,50.925
pads on no net: D4.1 MP1.A5 MP1.A6 MP1.A7 MP1.B5 MP1.B6 MP1.B7 MP1.P1 MP1.P2 MP1.P3 MP1.P4 U3.4 U3.5 U3.6 U3.10 U3.13 U3.15

## Polygon pours and split planes (outlines as drawn)
GND on Top Layer "GND_L01_P000" (solid, pour order 0): 2.344,88.275 34.1,88.275 66.6,55.775 66.6,13.525 53.1,13.525 48.6,18.025 47.01,31.54 2.344,61.389